# EAGLE board Funkschalter1V0.1 (EAGLE 9.0.0)
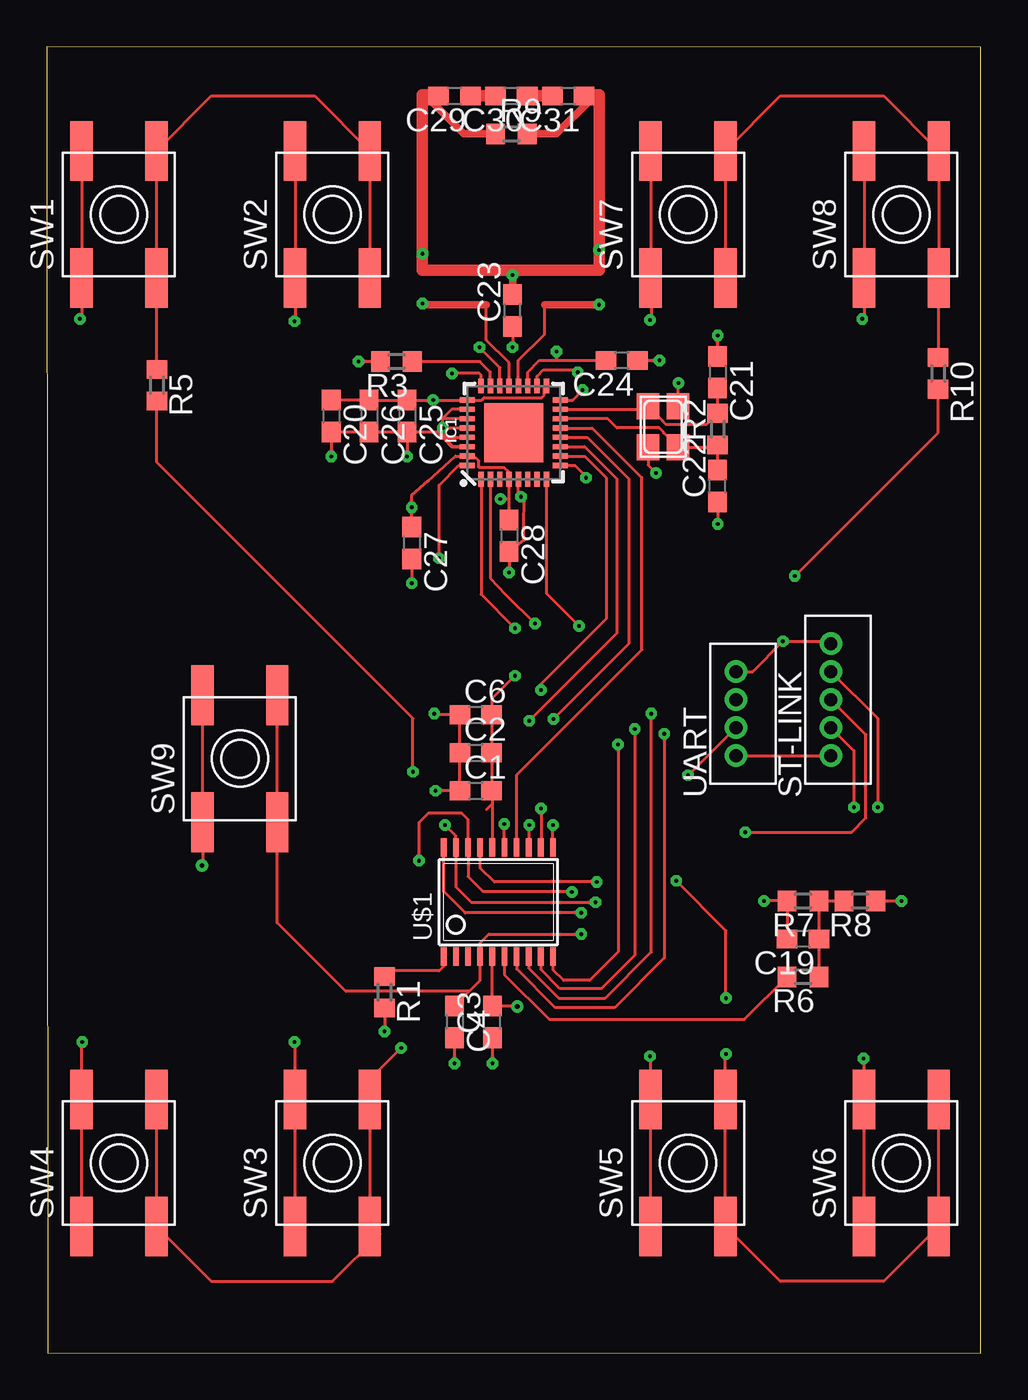
[diagram p0: board, top side]
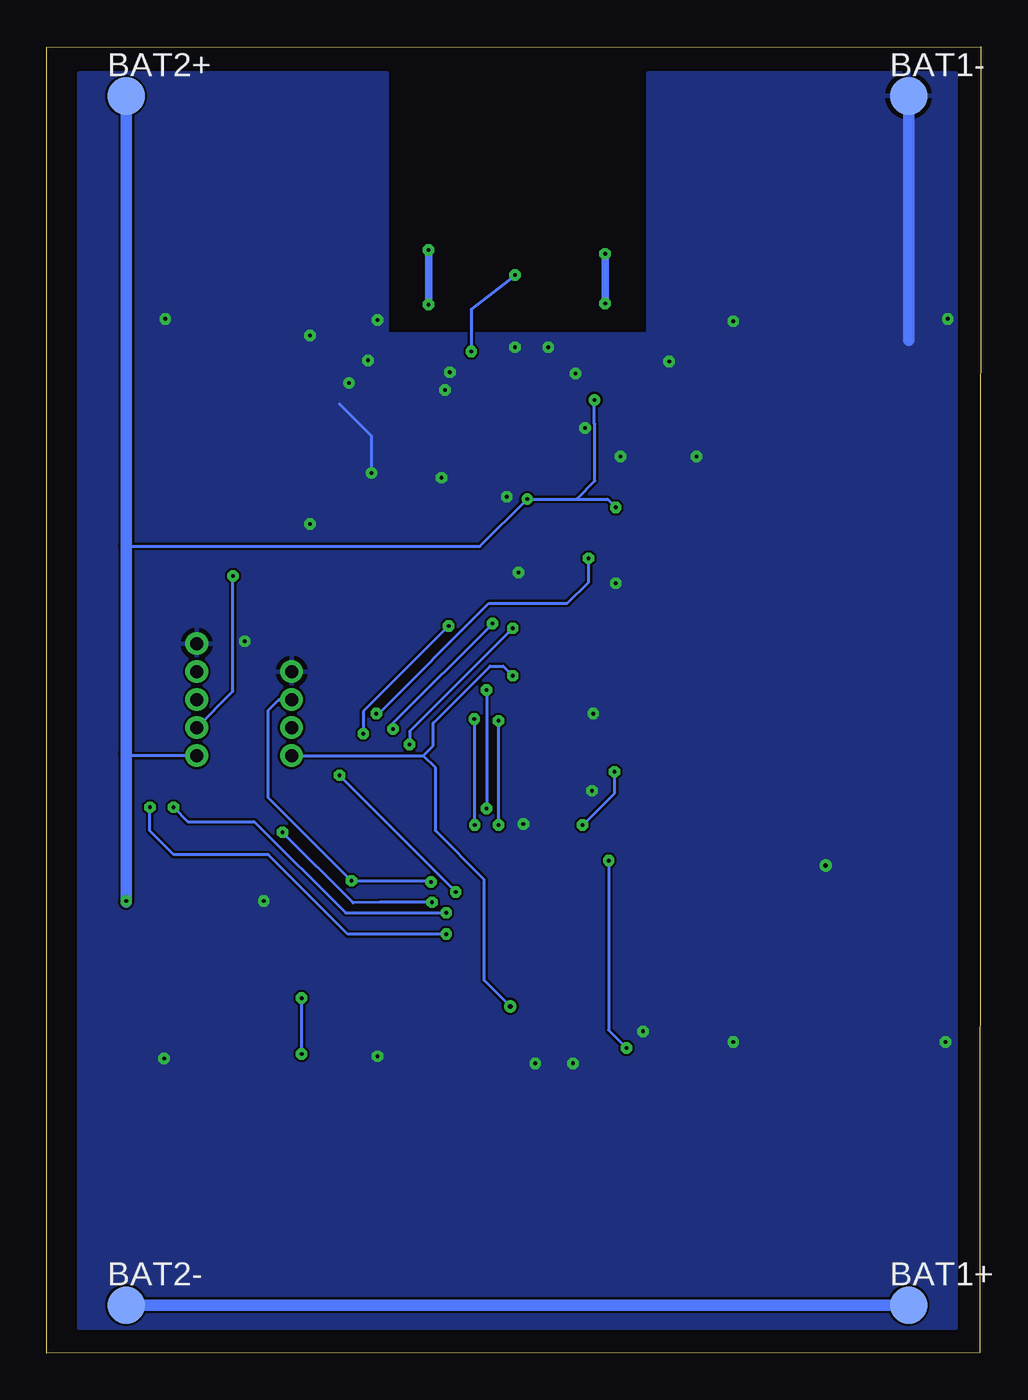
[diagram p1: board, bottom side, seen from below]

Size 50.04 x 69.99 mm. Coordinates in mm from the lower left corner, seen from the top.
Outline: 0.06,0.04 50.04,0 50.04,69.95 0,69.99 0.06,0.04
Copper layers (1*16): Top 0.035mm / dielectric 1.5mm / Bottom 0.035mm
Design rules "jlbpcb": minimum track width 5mil, minimum drill 0.2mm, track to track 5mil, track to pad 6mil, pad to pad 6mil, via to via 6mil, smd to smd 6mil, copper to edge 40mil, drill to drill 6mil, minimum pad ring 10mil, minimum via ring 8mil, stop-mask expansion 4mil, vias tented up to drill 0mil, thermal gap 10mil

## Footprints (pad centres in the part's own frame; a part is rotated, then mirrored left to right if it is on the bottom)
TP20R = smd 2 x 2: TP 0,0
C0603 = smd 1.1 x 1: 1 -0.85,0; 2 0.85,0
QFN32-5X5MM = smd 0.8 x 0.285: 1 -2.5,1.75; 2 -2.5,1.25; 3 -2.5,0.75; 4 -2.5,0.25; 5 -2.5,-0.25; 6 -2.5,-0.75; 7 -2.5,-1.25; 8 -2.5,-1.75; 17 2.5,-1.75; 18 2.5,-1.25; 19 2.5,-0.75; 20 2.5,-0.25; 21 2.5,0.25; 22 2.5,0.75; 23 2.5,1.25; 24 2.5,1.75 | smd 0.285 x 0.8: 9 -1.75,-2.5; 10 -1.25,-2.5; 11 -0.75,-2.5; 12 -0.25,-2.5; 13 0.25,-2.5; 14 0.75,-2.5; 15 1.25,-2.5; 16 1.75,-2.5; 25 1.75,2.5; 26 1.25,2.5; 27 0.75,2.5; 28 0.25,2.5; 29 -0.25,2.5; 30 -0.75,2.5; 31 -1.25,2.5; 32 -1.75,2.5 | smd 3.15 x 3.15: EP 0,0
NX3225 = smd 1.4 x 1.2: 1 -1.1,-0.8; 2 1.1,-0.8; 3 1.1,0.8; 4 -1.1,0.8
R0603 = smd 1 x 1.1: 1 -0.85,0; 2 0.85,0
B5B-ZR = drill 0.7: 1 7.5,-1.3; 2 6,-1.3; 3 4.5,-1.3; 4 3,-1.3; 5 1.5,-1.3
EVQ-Q2 = smd 3.2 x 1.2: A -3.4,-2; A' 3.4,-2; B -3.4,2; B' 3.4,2
TSSOP20 = smd 0.305 x 0.991: 1 -2.925,-2.918; 2 -2.275,-2.918; 3 -1.625,-2.918; 4 -0.975,-2.918; 5 -0.325,-2.918; 6 0.325,-2.918; 7 0.975,-2.918; 8 1.625,-2.918; 9 2.275,-2.918; 10 2.925,-2.918; 11 2.925,2.918; 12 2.275,2.918; 13 1.625,2.918; 14 0.975,2.918; 15 0.325,2.918; 16 -0.325,2.918; 17 -0.975,2.918; 18 -1.625,2.918; 19 -2.275,2.918; 20 -2.925,2.918
B4B-ZR = drill 0.7: 1 6,-1.3; 2 4.5,-1.3; 3 3,-1.3; 4 1.5,-1.3

## Placement (x,y rotation side)
BAT1+  TPTP20R  [TP20R]  3.87,2.58 0 bottom
BAT1-  TPTP20R  [TP20R]  3.87,67.35 0 bottom
BAT2+  TPTP20R  [TP20R]  45.78,67.35 0 bottom
BAT2-  TPTP20R  [TP20R]  45.78,2.58 0 bottom
C1  0.1uF  [C0603]  22.99,30.14 0 top
C2  0.1uF  [C0603]  22.99,32.17 0 top
C3  10nF  [C0603]  23.88,17.75 90 top
C4  4,7uF  [C0603]  21.84,17.75 270 top
C6  4,7uF  [C0603]  22.99,34.2 0 top
C19  10nF  [C0603]  40.51,22.2 180 top
C20  4.7uF  [C0603]  15.24,50.2 270 top
C21  22pF  [C0603]  35.94,52.55 270 top
C22  22pF  [C0603]  35.94,46.46 90 top
C23  33pF  [C0603]  24.96,55.85 90 top
C24  3.3nF  [C0603]  30.8,53.19 180 top
C25  33pF  [C0603]  19.3,50.2 270 top
C26  33pF  [C0603]  17.27,50.2 270 top
C27  10nF  [C0603]  19.56,43.41 270 top
C28  33pF  [C0603]  24.77,43.79 270 top
C29  5.6pF  [C0603]  21.84,67.35 180 top
C30  4.7pF  [C0603]  24.89,67.35 180 top
C31  3.9pF  [C0603]  27.94,67.35 180 top
IC1  nRF905  [QFN32-5X5MM]  25.02,49.31 90 top
Q1  X322516MRB4SI  [NX3225]  33.02,49.63 270 top
R1  10k  [R0603]  18.1,19.34 270 top
R2  1M  [R0603]  35.94,49.5 90 top
R3  22k  [R0603]  18.73,53.12 180 top
R5  0  [R0603]  5.91,51.85 270 top
R6  20k  [R0603]  40.51,20.17 180 top
R7  100k  [R0603]  40.51,24.23 180 top
R8  200k  [R0603]  43.56,24.23 180 top
R9  18k  [R0603]  24.89,65.32 0 top
R10  0  [R0603]  47.75,52.49 270 top
ST-LINK  B5B-ZR  [B5B-ZR]  40.7,30.52 90 top
SW1  K2-6639SP-C4SC-04  [EVQ-Q2]  3.87,61 90 top
SW2  TS  [EVQ-Q2]  15.3,61 90 top
SW3  TS  [EVQ-Q2]  15.3,10.2 90 top
SW4  TS  [EVQ-Q2]  3.87,10.2 90 top
SW5  TS  [EVQ-Q2]  34.35,10.2 90 top
SW6  TS  [EVQ-Q2]  45.78,10.2 90 top
SW7  TS  [EVQ-Q2]  34.35,61 90 top
SW8  TS  [EVQ-Q2]  45.78,61 90 top
SW9  SPST_TACT-EVQQ2  [EVQ-Q2]  10.35,31.85 90 top
U$1  STM32F030F4  [TSSOP20]  24.19,24.17 0 top
UART  B4B-ZR  [B4B-ZR]  35.62,30.52 90 top

## Library data of the parts
BAT1+ BAT1- BAT2+ BAT2- = testpad
C1-C4 C6 C19-C31 = rcl; SPICEPREFIX: C
IC1 = nordic-semi
Q1 SW1-SW9 = adafruit
R1-R3 R5-R10 = rcl; SPICEPREFIX: R
ST-LINK UART = jst
U$1 = stm32f030f4

## Nets
CSN: IC1.13 U$1.14
DR: IC1.8 U$1.7
GND: BAT1-.TP C1.1 C2.1 C3.1 C4.2 C6.1 C19.2 C20.2 C21.1 C22.1 C23.1 C24.1 C25.2 C26.2 C27.2 C28.2 IC1.5 IC1.9 IC1.16 IC1.18 IC1.22 IC1.24 IC1.26 IC1.27 IC1.28 IC1.29 IC1.30 Q1.2 Q1.4 R1.2 R3.2 R7.2 ST-LINK.1 SW1.B SW1.B' SW2.B SW2.B' SW3.B SW3.B' SW4.B SW4.B' SW5.B SW5.B' SW6.B SW6.B' SW7.B SW7.B' SW8.B SW8.B' SW9.B SW9.B' U$1.15 UART.1
MISO: IC1.10 U$1.12
MOSI: IC1.11 U$1.13
N$1: R5.1 SW1.A SW1.A' SW2.A SW2.A'
N$2: R1.1 U$1.1
N$3: R6.2 U$1.6
N$4: R10.1 SW7.A SW7.A' SW8.A SW8.A'
N$5: BAT1+.TP BAT2-.TP
N$9: C19.1 R6.1 R7.1 R8.2
N$12: C21.2 IC1.15 Q1.1 R2.2
N$13: C22.2 IC1.14 Q1.3 R2.1
N$16: IC1.23 R3.1
N$18: C23.2 C24.2 C29.2 C31.1 IC1.19 IC1.20 IC1.21 R9.1 R9.2
N$19: C30.1 C31.2
N$20: C29.1 C30.2
NRST: C4.1 ST-LINK.2 SW9.A SW9.A' U$1.4
PWRUP: IC1.2 U$1.9
SCK: IC1.12 U$1.11
SWCLK: R10.2 ST-LINK.4 U$1.20
SWDIO: R5.2 ST-LINK.3 U$1.19
TRX_CE: IC1.1 U$1.10
TX_EN: IC1.32 U$1.8
USART1_RX: SW3.A SW3.A' SW4.A SW4.A' U$1.18 UART.3
USART1_TX: SW5.A SW5.A' SW6.A SW6.A' U$1.17 UART.2
VCC: BAT2+.TP C1.2 C2.2 C3.2 C6.2 C20.1 C25.1 C26.1 C27.1 C28.1 IC1.4 IC1.17 IC1.25 IC1.31 R8.1 ST-LINK.5 U$1.5 U$1.16 UART.4

## Tracks (layer width: path | path; a pad name or v marks a point on that pad's centre or on a via)
CSN
  Top 0.152: IC1.13 29.21,49.56 31.88,46.9 31.88,37.69 25.17,30.99 U$1.14
DR  (via drill 0.2)
  Top 0.152: IC1.8 26.77,40.71 v28.51,38.96 | U$1.7 25.17,20.59 27.24,18.52 30.42,18.52 33.08,21.18 v33.08,33.19
  Bottom 0.152: v28.51,38.96 33.08,34.39 v33.08,33.19
GND  (via drill 0.2, 0.25)
  Top 0.152: C25.2 C26.2 C20.2 v15.24,48.04 | C25.2 20.93,49.35 21.67,48.56 IC1.30 21.77,48.56 21.21,49.12 21.21,49.31 | 25.27,46.01 25.59,45.64 25.56,44.46 25.56,43.54 C28.2 v24.76,41.82 | 25.27,46.01 IC1.5 | SW4.B SW4.B' 1.87,16.64 v1.9,16.68 | SW3.B SW3.B' 13.3,16.64 v13.27,16.68 | SW5.B SW5.B' 32.35,15.88 v32.32,15.91 | SW6.B SW6.B' 43.78,15.75 v43.75,15.79 | SW1.B' SW1.B 1.87,55.51 v1.78,55.41 | SW2.B' SW2.B 13.3,55.32 v13.27,55.28 | SW7.B' SW7.B 32.39,57.57 32.39,55.41 v32.32,55.35 | SW8.B' SW8.B 43.78,55.51 v43.69,55.41 | UART.1 37.81,36.52 v39.43,38.14 41.88,38.14 ST-LINK.1 | R3.2 v16.7,53.12 | C27.2 v19.56,41.25 | 25.27,46.01 v25.4,45.89 | IC1.9 28.29,47.56 28.89,46.96 v28.89,46.9 | C22.1 v35.94,44.42 | C21.1 v35.94,54.52 | C24.1 v32.83,53.19 | IC1.16 28.17,51.06 v28.7,51.6 | IC1.18 26.27,52.34 26.61,52.68 28.32,52.68 v28.45,52.55 | IC1.24 23.27,52.4 23.18,52.49 v21.72,52.49 | IC1.26 21.7,50.56 21.21,50.08 21.21,50.01 | 21.21,49.31 v21.21,49.57 | v21.21,49.57 21.21,50.01 | 21.21,49.31 21.46,49.06 IC1.29 | IC1.28 v21.21,49.56 v21.21,49.57 | IC1.27 21.26,50.06 21.21,50.01 | C25.2 v19.3,48.04 | C23.1 v24.96,53.89 | IC1.22 24.27,52.8 v23.18,53.89 | C3.1 v23.88,15.53 | C4.2 v21.84,15.53 | U$1.15 v24.52,28.35 v24.51,28.36 | v20.76,34.27 20.83,34.2 C6.1 C2.1 C1.1 v20.83,30.14 | SW9.B' SW9.B 8.35,26.17 v8.32,26.14 | C19.2 R7.2 v38.42,24.23 | Q1.2 32.22,47.57 v32.64,47.16 | Q1.4 33.82,51.96 v33.85,51.98 | R1.2 v18.1,17.25
  Bottom 0.152: v32.64,47.16 32.64,49.12 34.35,50.84
  Bottom 0.61: BAT1-.TP 3.87,54.27
  pour Bottom: 1.33,1.31 48.32,1.31 48.32,68.62 31.81,68.62 31.81,54.65 17.84,54.65 17.84,68.62 1.33,68.62
MISO  (via drill 0.2)
  Top 0.152: IC1.10 27.54,48.04 28.83,48.04 29.97,46.9 29.97,39.34 26.48,35.85 | 26.48,35.85 26.47,35.84 | 26.48,35.85 v26.48,35.53 | v26.48,29.18 26.48,27.1 U$1.12
  Bottom 0.152: v26.48,35.53 v26.48,29.18
MOSI  (via drill 0.2)
  Top 0.152: IC1.11 28.82,48.56 30.54,46.84 30.54,38.58 v25.84,33.88 | 25.84,27.11 U$1.13 25.82,28.27 v25.84,28.3
  Bottom 0.152: v25.84,33.88 v25.84,28.3
N$1
  Top 0.152: SW2.A SW2.A' 14.35,67.35 8.82,67.35 SW1.A' SW1.A 5.91,57.57 R5.1
N$2
  Top 0.152: R1.1 18.1,20.42 18.16,20.49 21.02,20.49 21.27,20.74 U$1.1
N$3
  Top 0.152: U$1.6 24.52,20.29 26.92,17.88 37.38,17.88 R6.2
N$4
  Top 0.152: SW7.A SW7.A' 39.3,67.35 44.83,67.35 SW8.A' SW8.A 47.78,53.37 R10.1
N$5
  Bottom 0.61: BAT1+.TP BAT2-.TP
N$9
  Top 0.152: R6.1 C19.1 R7.1 R8.2
N$12
  Top 0.152: C21.2 R2.2 35.35,49.76 33.17,49.76 32.99,49.94 32.99,49.96 Q1.1 32.05,50.56 IC1.15
N$13
  Top 0.152: C22.2 35.94,48.55 | 35.94,48.55 R2.1 | IC1.14 30.05,50.06 30.54,49.57 32.81,49.57 33.05,49.33 33.05,49.3 Q1.3 35.92,48.53 35.94,48.55
N$16
  Top 0.152: IC1.23 23.77,52.2 23.77,52.56 23.21,53.12 R3.1
N$18  (via drill 0.2)
  Top 0.152: IC1.19 25.77,51.94 25.77,52.56 26.4,53.19 27.3,53.19 | 27.3,53.19 C24.2 | 26.67,56.17 26.67,54.59 25.27,53.18 IC1.20 | IC1.21 24.77,53.06 23.56,54.27 23.56,56.17 | v27.3,53.66 27.3,53.19
  Top 0.406: R9.2 27.3,65.32 29.15,67.16 29.15,67.41 | R9.1 22.35,65.32 20.64,67.03 20.64,67.41 | 26.67,56.17 v29.59,56.17 | 23.56,56.17 20.19,56.17 v20.13,56.24 | 25.02,58.01 24.96,58.08 v24.96,57.76 C23.2
  Top 0.61: C29.2 20.93,67.41 20.64,67.41 20.13,67.41 v20.13,58.9 20.13,58.01 25.02,58.01 29.59,58.01 v29.59,59.09 29.59,67.41 29.15,67.41 28.85,67.41 C31.1
  Bottom 0.152: v24.96,57.76 27.3,55.92 v27.3,53.66
  Bottom 0.406: v29.59,56.17 v29.59,59.09 | v20.13,56.24 v20.13,58.9
N$19
  Top 0.61: C30.1 C31.2
N$20
  Top 0.61: C29.1 C30.2
NRST  (via drill 0.2)
  Top 0.152: ST-LINK.2 44.51,34.01 v44.51,29.25 | C4.1 22.63,19.39 | 22.63,19.39 23.22,19.98 U$1.4 23.22,21.99 23.69,22.45 v28.64,22.45 | SW9.A' SW9.A 12.35,23.06 16.02,19.39 22.63,19.39
  Bottom 0.152: v28.64,22.45 33.91,22.45 38.16,26.71 43.24,26.71 44.51,27.98 v44.51,29.25
PWRUP  (via drill 0.2)
  Top 0.152: IC1.2 23.77,41.52 24.57,40.66 v26.16,39.09 | U$1.9 26.47,20.56 27.5,19.53 29.72,19.53 31.5,21.31 v31.5,33.44
  Bottom 0.152: v26.16,39.09 31.5,33.76 v31.5,33.44
SCK  (via drill 0.2)
  Top 0.152: IC1.12 28.95,49.06 31.18,46.84 31.18,38.01 v27.14,33.98 27.12,33.95 | U$1.11 v27.12,28.29 v27.11,28.3
  Bottom 0.152: v27.11,28.3 27.11,33.95 v27.14,33.98
SWCLK  (via drill 0.2)
  Top 0.152: ST-LINK.4 43.24,32.28 v43.24,29.25 | v28.64,23.6 22.42,23.6 21.27,24.74 U$1.20 | v40.07,41.63 47.75,49.31 R10.2
  Bottom 0.152: v43.24,29.25 42.48,28.49 38.93,28.49 34.04,23.6 v28.64,23.6 | ST-LINK.4 40.07,35.45 v40.07,41.63
SWDIO  (via drill 0.2)
  Top 0.152: ST-LINK.3 43.88,33.14 43.88,28.68 43.12,27.92 v37.42,27.92 | v29.4,24.17 22.74,24.17 21.92,24.98 U$1.19 21.92,27.71 v21.34,28.3 | v19.62,31.15 19.62,34.01 5.91,47.73 R5.2
  Bottom 0.152: v29.4,24.17 32.2,24.17 33.63,24.13 v37.42,27.92 | v21.34,28.3 19.62,30.01 v19.62,31.15
TRX_CE  (via drill 0.2)
  Top 0.152: U$1.10 27.12,20.54 27.69,19.98 29.08,19.98 30.61,21.5 v30.61,32.61 | IC1.1 23.27,40.65 v25.08,38.84
  Bottom 0.152: v25.08,38.84 30.61,33.31 v30.61,32.61
TX_EN  (via drill 0.2)
  Top 0.152: U$1.8 25.82,20.64 27.43,19.02 29.91,19.02 32.39,21.5 v32.39,34.27 | v21.02,42.58 21.02,46.5 22.08,47.56 IC1.32
  Bottom 0.152: v32.39,34.27 32.39,34.14 26.35,40.17 22.16,40.17 21.02,41.31 v21.02,42.58
USART1_RX  (via drill 0.2)
  Top 0.152: SW4.A' SW4.A 8.82,3.85 15.3,3.85 17.84,6.39 17.43,6.8 SW3.A SW3.A' 17.3,14.67 v18.99,16.36 | v19.94,26.39 19.94,28.42 20.45,28.93 22.23,28.93 22.57,28.59 U$1.18 22.57,25.54 23.37,24.74 28.11,24.74 v28.13,24.72 | v34.35,30.96 36.91,33.52 UART.3
  Bottom 0.152: v19.94,26.39 19.94,17.31 v18.99,16.36 | v28.13,24.72 34.35,30.94 v34.35,30.96
USART1_TX  (via drill 0.2)
  Top 0.152: SW6.A' SW6.A 44.83,3.85 39.3,3.85 SW5.A SW5.A' 36.35,16.01 v36.39,16.04 | U$1.17 23.23,25.99 23.98,25.25 v29.46,25.25 | v36.39,19.02 36.39,22.64 v33.72,25.31
  Bottom 0.152: v36.39,16.04 v36.39,19.02 | v29.46,25.25 29.53,25.31 v33.72,25.31 38.16,29.76 38.16,34.46 37.6,35.02 UART.2
VCC  (via drill 0.2, 0.25)
  Top 0.152: C27.1 v19.56,45.31 19.56,45.97 20.45,46.74 21.9,48.06 22.26,48.06 IC1.31 22.65,47.94 23.01,47.94 23.15,47.8 23.15,47.44 24.51,47.44 24.76,47.18 IC1.4 | 23.87,29.44 23.87,30.11 C1.2 C2.2 C6.2 23.84,35.05 v25.08,36.3 | 23.87,29.44 U$1.16 | C20.1 C26.1 C25.1 v20.7,51.06 20.84,51.06 IC1.25 23.3,51.06 23.42,51.19 26.51,51.19 26.64,51.32 26.64,51.69 IC1.17 | C28.1 24.76,45.76 | 24.76,45.76 IC1.4 | UART.4 ST-LINK.5 | 24.76,45.76 v24.3,45.76 | R8.1 v45.78,24.23 | 23.55,29.12 23.87,29.44 | IC1.4 | U$1.5 23.88,21.24 C3.2 25.19,18.61 v25.21,18.58
  Bottom 0.152: 21.65,45.76 v24.3,45.76 26.84,43.22 45.78,43.22 | 21.65,45.76 20,45.76 v19.56,45.31 | ST-LINK.5 45.7,32.02 45.78,32.11 | v20.7,51.06 20.7,49.8 20.68,49.78 20.68,46.73 21.65,45.76 | UART.4 29.87,32.02 | 29.87,32.02 29.34,32.55 29.34,33.76 26.29,36.81 25.59,36.81 v25.08,36.3 | v25.21,18.58 26.61,19.98 26.61,25.38 29.21,27.98 29.21,31.36 29.87,32.02
  Bottom 0.61: BAT2+.TP 45.78,43.22 45.78,32.11 v45.78,24.23 45.78,24.17